# Altium PCB Ultrasound_Test_Prototype.PcbDoc
Units mil, origin at the board's own origin, x right, y up, seen from the top; angles counter-clockwise.
Board outline 1181.1 x 1181.1 mil, 2 copper layers (Top Layer, Bottom Layer); 34 components, 26 nets, 108 pads, 34 vias.
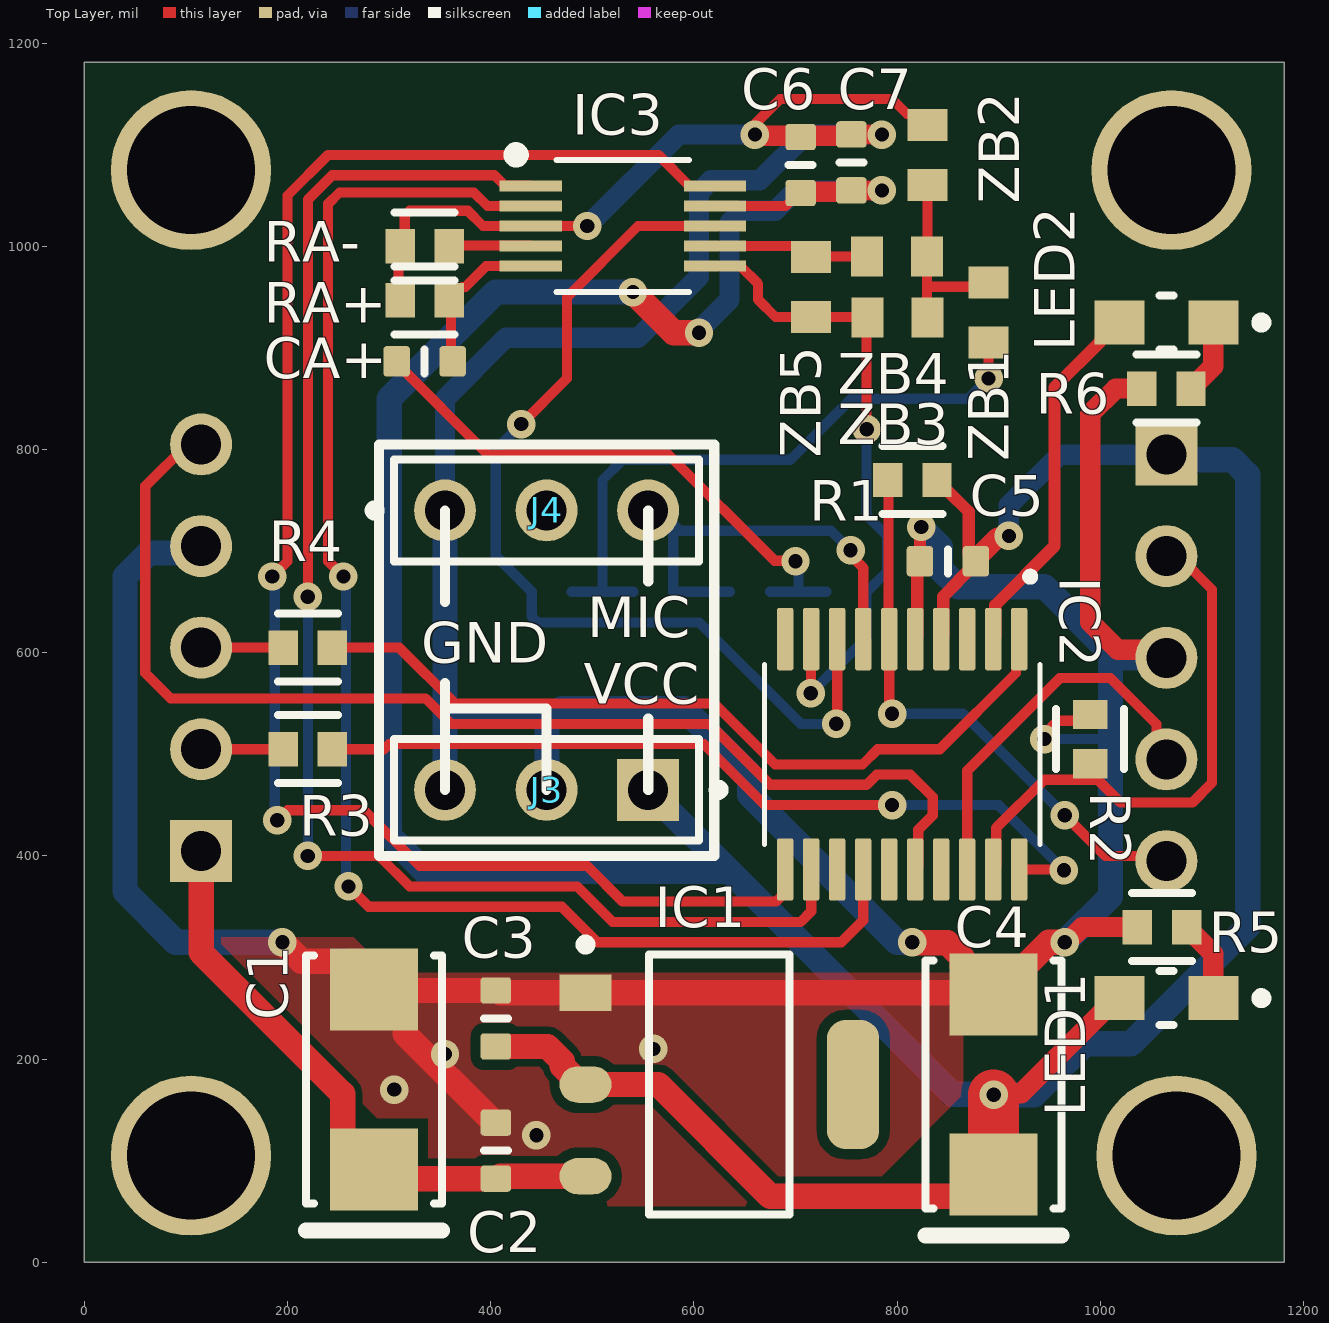
[diagram p0: Top Layer view]
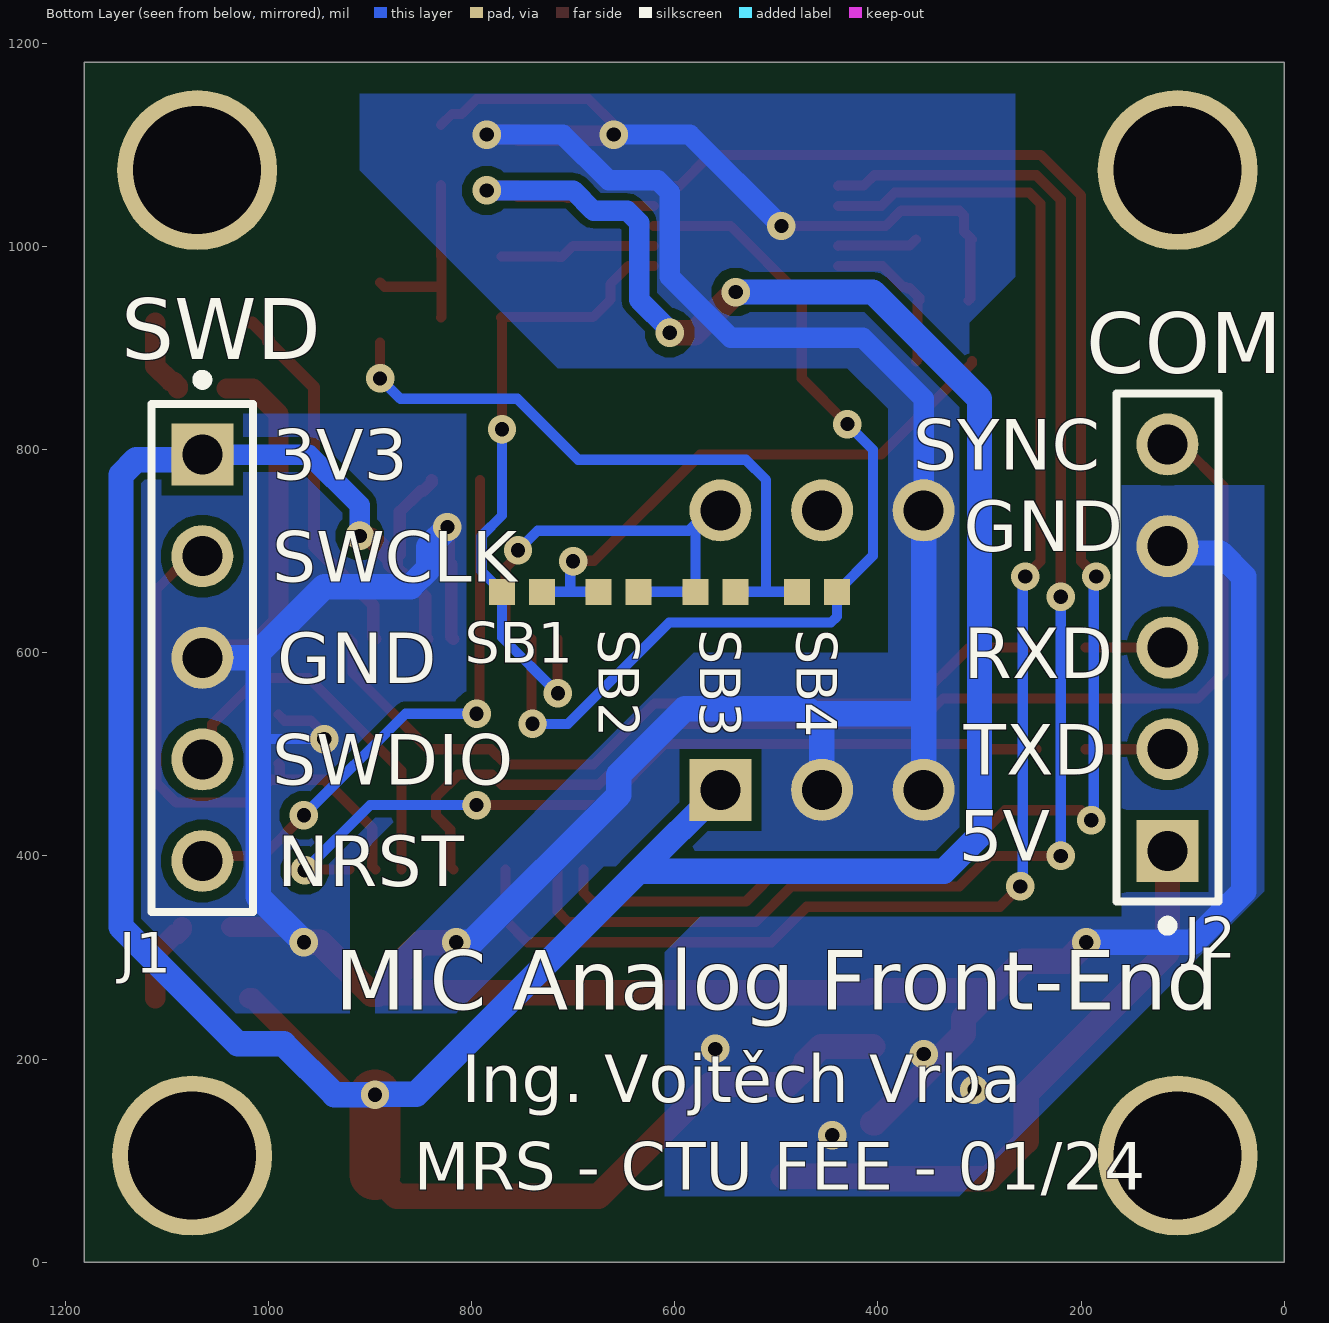
[diagram p1: Bottom Layer view, seen from below]
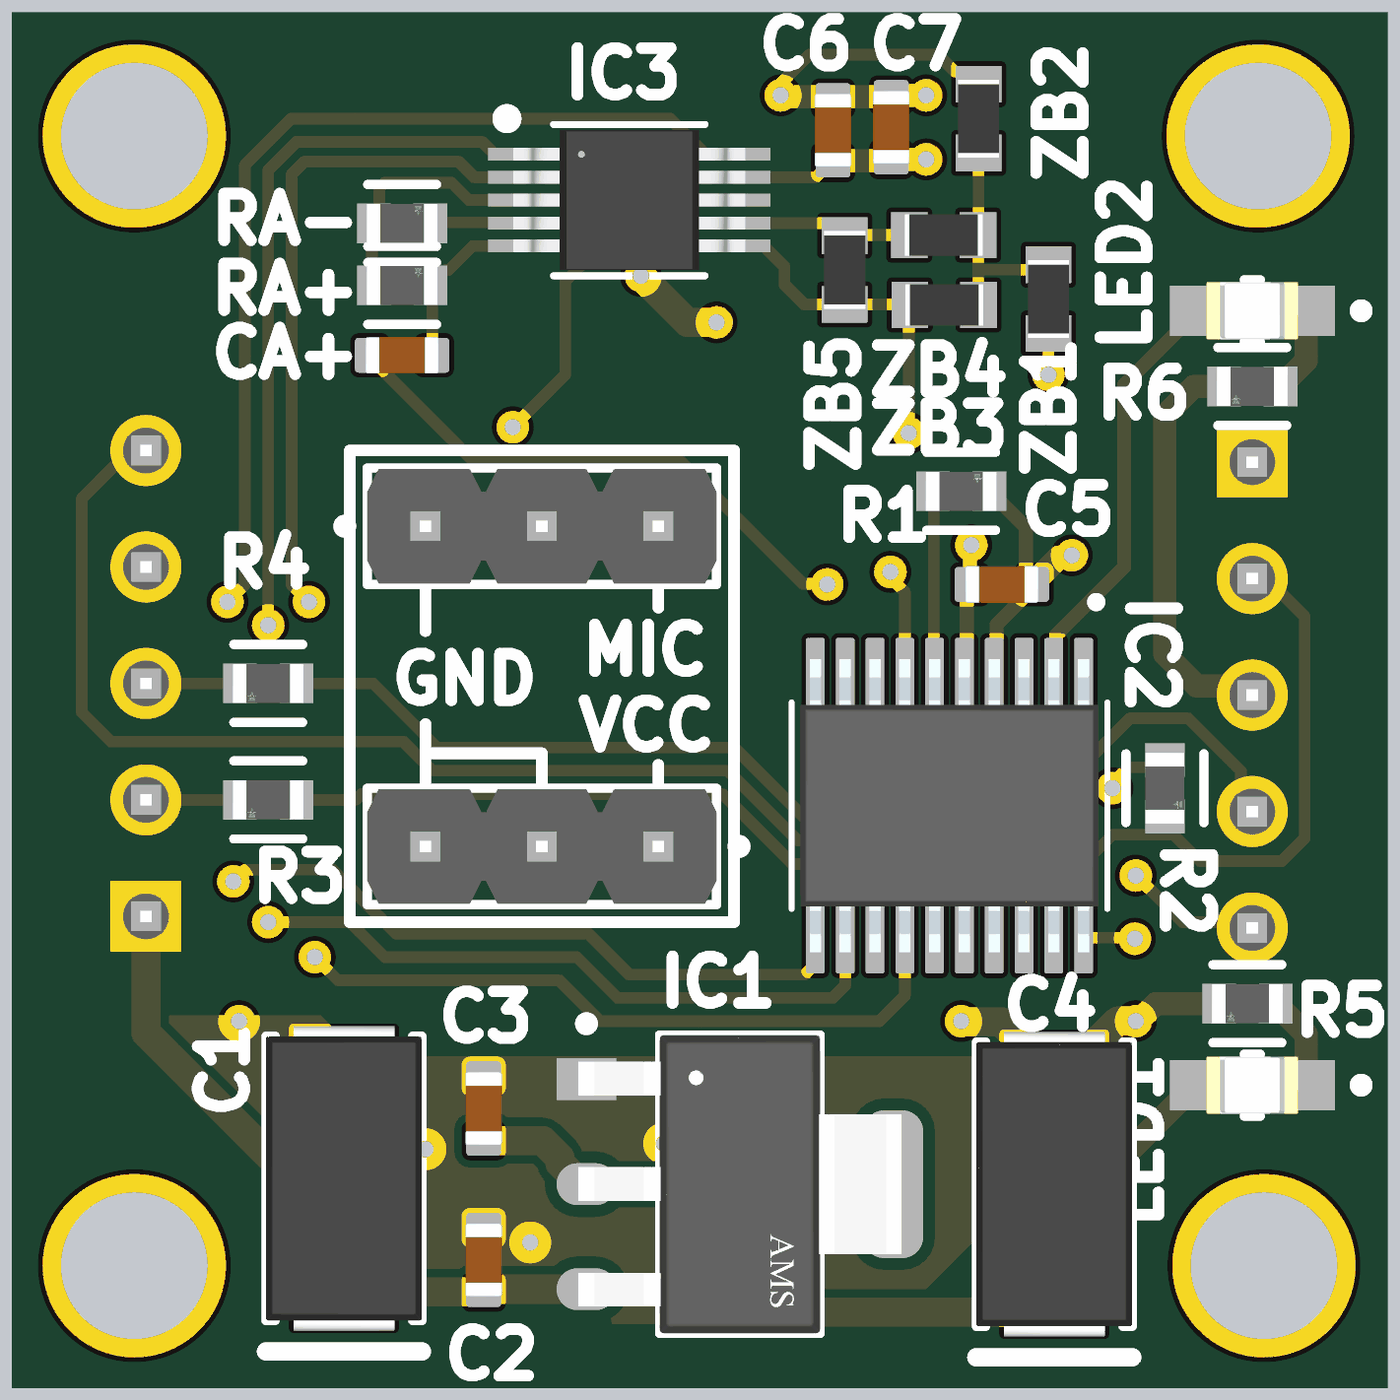
[diagram p2: 3D render of the assembled board from above, using the file's embedded part models]
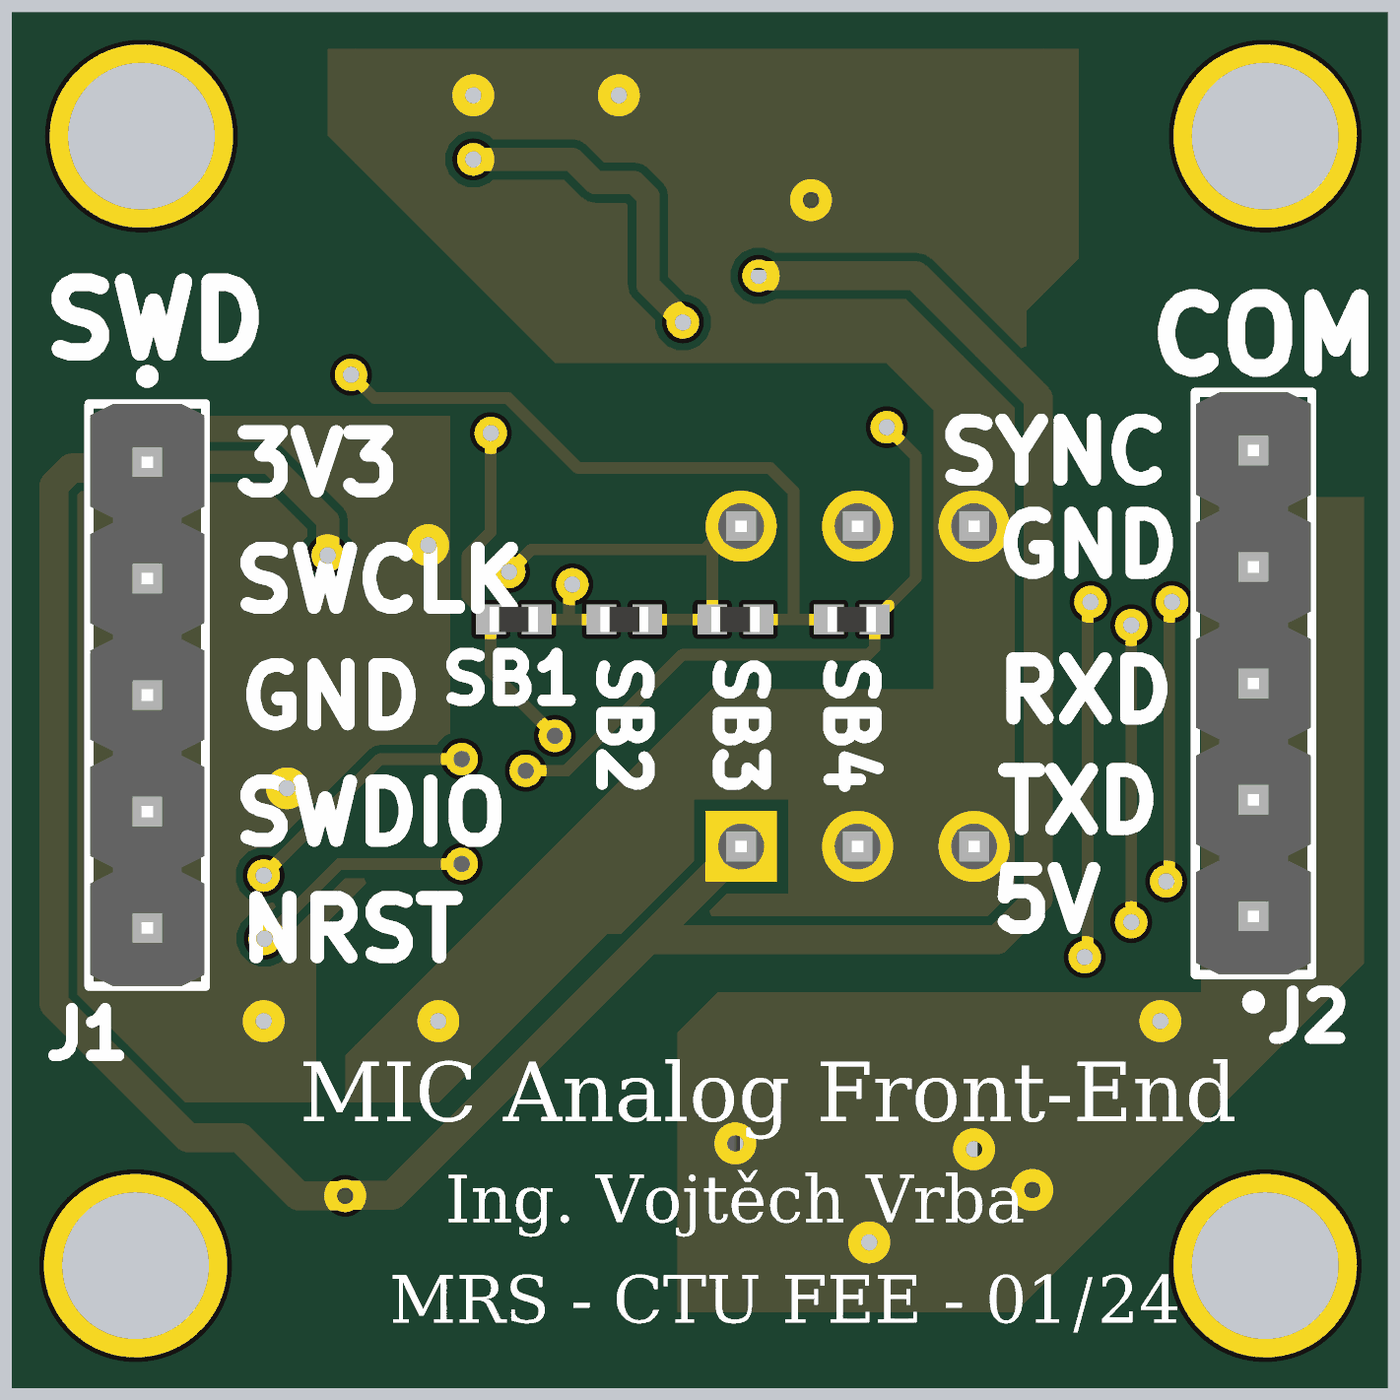
[diagram p3: 3D render of the assembled board from below, using the file's embedded part models]

## Layer stack, top to bottom
Top Solder: solder mask 0.4, Solder Resist, Dk 3.5
Top Layer: signal copper 1.4
Dielectric 1: dielectric 12.6, FR-4, Dk 4.8
Bottom Layer: signal copper 1.4
Bottom Solder: solder mask 0.4, Solder Resist, Dk 3.5

## Board outline
0,0 0,1181.1 1181.1,1181.1 1181.1,0

## Design rules (kind name [scope] priority, off if disabled: settings)
Clearance Clearance_1 [OnMid vs OnMid] p1: gap=7 ignorepadtopadclearanceinfootprint=FALSE except(10: SMDPad-Via SMDPad-Fill SMDPad-Poly SMDPad-Region SMDPad-Hole THPad-THPad THPad-Via THPad-Fill THPad-Poly THPad-Region THPad-Hole Via-Via Via-Fill Via-Poly Via-Region Via-Hole Fill-Fill Fill-Poly Fill-Region Fill-Hole Poly-Poly Poly-Region Poly-Hole Region-Region Region-Hole Hole-Hole) sourcerule=37 cellrowname=All cellrowtype=0 cellcolname=All cellcoltype=0 innerlayers=TRUE
Clearance Clearance_2 [(ExistsOnLayer('Top Layer') Or ExistsOnLayer('Bottom Layer')) vs (ExistsOnLayer('Top Layer') Or ExistsOnLayer('Bottom Layer'))] p2: gap=7 ignorepadtopadclearanceinfootprint=FALSE except(10: SMDPad-Via SMDPad-Fill SMDPad-Poly SMDPad-Region SMDPad-Hole THPad-THPad THPad-Via THPad-Fill THPad-Poly THPad-Region THPad-Hole Via-Via Via-Fill Via-Poly Via-Region Via-Hole Fill-Fill Fill-Poly Fill-Region Fill-Hole Poly-Poly Poly-Region Poly-Hole Region-Region Region-Hole Hole-Hole) sourcerule=37 cellrowname=All cellrowtype=0 cellcolname=All cellcoltype=0 outerlayers=TRUE
Clearance [All] p3: gap=10 ignorepadtopadclearanceinfootprint=FALSE ismatrix=TRUE
PlaneConnect [All] p1: planeconnectstyle=Direct reliefexpansion=20 reliefentries=4 reliefconductorwidth=10 reliefairgap=10
PolygonConnect [All] p1: connectstyle=Direct reliefconductorwidth=10 reliefentries=4 polygonreliefangle="90 Angle" airgapwidth=10
RoutingVias [All] p1: holewidth=28 width=50 viastyle="Through Hole" minholewidth=28 minwidth=50 maxholewidth=28 maxwidth=50
SolderMaskExpansion [All] p1: expansion=4 istentingtop=FALSE
Width MaxMinWidth_1 [All] p1: maxlimit=100 minlimit=10 preferedwidth=10 minimp=50.000000 maximp=50.000000 favimp=50.000000
Width [All] p2: maxlimit=10 minlimit=10 preferedwidth=10
29 further rules are at their usual default settings.

## Components (designator, comment, footprint, x,y, rotation, side; value= is the part's Value field where it differs from the comment)
C1 "TAJC107K010RNJ" AVX-TAJ-C-2_L 285,179.99 r90 top value=47u/10V
C2 "Capacitor 1µF +/-0.1% 25V 0603" CAPC0603(1608)100_L 405,109.99 r90 top value=100n
C3 "Capacitor 1µF +/-0.1% 25V 0603" CAPC0603(1608)100_L 405,239.99 r90 top value=100n
C4 "TAJC107K010RNJ" AVX-TAJ-C-2_L 895,174.99 r90 top value=47u/10V
C5 "Capacitor 1µF +/-0.1% 25V 0603" CAPC0603(1608)100_L 850,690 r180 top value=100n
C6 "Capacitor 1µF +/-0.1% 25V 0603" CAPC0603(1608)100_L 705,1080 r90 top value=100n
C7 "Capacitor 1µF +/-0.1% 25V 0603" CAPC0603(1608)100_L 755,1082.56 r90 top value=1u
CA+ "Capacitor 1µF +/-0.1% 25V 0603" CAPC0603(1608)100_L 335,886.81 r0 top value=10u
IC1 "AMS1117-3.3" FP-AMS1117-IPC_B 625,174.99 r0 top
IC2 "STM32G031F6P6TR" SOIC65P640X120-20N 805,500 r270 top
IC3 "MAX9939AUB+" 21-0061L_MXM-M 530,1020 r0 top
J1 "90120-0125" FP-90120-0125-MFG 1065,595 r270 bottom
J2 "90120-0125" FP-90120-0125-MFG 114.99,605 r90 bottom
J3 "90120-0123" FP-90120-0123-MFG#1 455,465 r180 top
J4 "90120-0123" FP-90120-0123-MFG#2 455,740 r0 top
LED1 "RED" FP-SML-21-MFG 1065,260 r180 top
LED2 "GREEN" FP-SML-21-MFG 1065,925 r180 top
R1 "Resistor European" FP-CRCW0603-e3-IPC_C 815,770 r0 top value=10k
R2 "Resistor European" FP-CRCW0603-e3-IPC_C 990,515 r270 top value=10k
R3 "Resistor European" FP-CRCW0603-e3-IPC_C 219.99,505 r180 top value=22R
R4 "Resistor European" FP-CRCW0603-e3-IPC_C 219.99,605 r180 top value=22R
R5 "Resistor European" FP-CRCW0603-e3-IPC_C 1060.77,330 r180 top value=330R
R6 "Resistor European" FP-CRCW0603-e3-IPC_C 1065,860 r180 top value=330R
RA+ "Resistor European" FP-CRCW0603-e3-IPC_C 335,946.81 r0 top value=200R
RA- "Resistor European" FP-CRCW0603-e3-IPC_C 335,1000 r0 top value=200R
SB1 "Resistor 0R +/- 5% 0402 100 mW" RESC1005X40X25ML05T05 750.31,660 r0 bottom value=Open
SB2 "Resistor 0R +/- 5% 0402 100 mW" RESC1005X40X25ML05T05 655.31,660 r0 bottom value=Close
SB3 "Resistor 0R +/- 5% 0402 100 mW" RESC1005X40X25ML05T05 560,660 r0 bottom value=Open
SB4 "Resistor 0R +/- 5% 0402 100 mW" RESC1005X40X25ML05T05 460,660 r0 bottom value=Close
ZB1 "Resistor 10k +/-1% 0603 100 mW" RESC1608X55X25ML10T15 890,935 r270 top value=TBD
ZB2 "Resistor 10k +/-1% 0603 100 mW" RESC1608X55X25ML10T15 830,1090 r270 top value=TBD
ZB3 "Resistor 10k +/-1% 0603 100 mW" RESC1608X55X25ML10T15 800.47,930 r0 top value=TBD
ZB4 "Resistor 10k +/-1% 0603 100 mW" RESC1608X55X25ML10T15 800,990 r0 top value=TBD
ZB5 "Resistor 10k +/-1% 0603 100 mW" RESC1608X55X25ML10T15 715,960 r90 top value=TBD

## Footprints (in the part's own frame and the unit in brackets; to place one, negate y for a bottom-side part, rotate by r counter-clockwise, add the part's x,y. Pads: shape width x height; smd on the part's side, far side on the other; paste and mask are expansions set on the pad)
21-0061L_MXM-M [mil]
  rect 61.15x11 smd paste+0 mask+0: 1(-90.58,39.37) 2(-90.58,19.68) 3(-90.58,0) 4(-90.58,-19.68) 5(-90.58,-39.37) 6(90.58,-39.37) 7(90.58,-19.68) 8(90.58,0) 9(90.58,19.68) 10(90.58,39.37)
  silkscreen extent -110,-65 65,75, body extent -99,-60 99,60, height 43
AVX-TAJ-C-2_L [mm] "Molded Capacitor, 2-Leads, Body 6.2x3.4mm, IPC High Density"
  rect 2.05x2.2 smd: 1(-2.25,0) 2(2.25,0)
  silkscreen extent -3.77,-1.7 3.1,1.7, body extent -3.32,-1.7 3.32,1.7, height 2.8
CAPC0603(1608)100_L [mm] "Chip Capacitor, Body 1.6x0.8mm, Height 1.0mm, IPC High Density"
  rrect25% 0.66x0.76 smd: 1(-0.7,0) 2(0.7,0)
  silkscreen extent 0,-0.3 0,0.3, body extent -0.8,-0.4 0.8,0.4, height 0.95
FP-90120-0123-MFG#1 [mm]
  rect 1.55x1.55 hole 1 paste-2539.97 mask+0: 1(-2.54,0)
  round 1.55 hole 1 paste-2539.97 mask+0: 2(0,0) 3(2.54,0)
  silkscreen extent -4.43,-1.27 3.81,1.27, body extent -3.91,-1.37 3.91,1.37, height 0.25
FP-90120-0123-MFG#2 [mm]
  round 1.55 hole 1 paste-2539.97 mask+0: 1(-2.54,0) 2(0,0) 3(2.54,0)
  silkscreen extent -4.42,-1.27 3.81,1.27, body extent -3.91,-1.37 3.91,1.37, height 0.25
FP-90120-0125-MFG [mm]
  rect 1.55x1.55 hole 1 paste-2539.97 mask+0: 1(-5.08,0)
  round 1.55 hole 1 paste-2539.97 mask+0: 2(-2.54,0) 3(0,0) 4(2.54,0) 5(5.08,0)
  silkscreen extent -7.07,-1.27 6.35,1.27, body extent -6.35,-1.25 6.35,1.25, height 9.65
FP-AMS1117-IPC_B [mm]
  rect 1.304x0.912 smd paste+0 mask+0: 1(-3.345,2.29)
  rrect100% 1.304x0.912 smd paste+0 mask+0: 2(-3.345,0) 3(-3.345,-2.29)
  rrect70% 1.304x3.222 smd paste+0 mask+0: 4(3.345,0)
  silkscreen extent -3.47,-3.25 1.75,3.62, body extent -4.25,-3.5 4.25,3.5, height 0.25
FP-CRCW0603-e3-IPC_C [mil]
  rect 28.94x33.94 smd paste+0 mask+0: 1(-24.23,0) 2(24.23,0)
  silkscreen extent -30,-33 30,33, body extent -43,-23 43,23, height 10
FP-SML-21-MFG [mm]
  rect 1.25x1.1 smd paste+0 mask+0: 1(-1.175,0) 2(1.175,0)
  silkscreen extent -2.5,-0.67 0.18,0.67, body extent -1.9,-0.77 1.9,0.77, height 0.25
RESC1005X40X25ML05T05 [mm] "Chip Resistor, 2-Leads, Body 1.05x0.55mm, IPC Low Density"
  rect 0.65x0.65 smd: 1(-0.5,0) 2(0.5,0)
  body extent -0.53,-0.28 0.53,0.28, height 0.4
RESC1608X55X25ML10T15 [mm] "Chip Resistor, 2-Leads, Body 1.70x0.90mm, IPC Low Density"
  rect 0.8x1 smd: 1(-0.75,0) 2(0.75,0)
  body extent -0.85,-0.45 0.85,0.45, height 0.55
SOIC65P640X120-20N [mm]
  rrect25% 1.56x0.41 smd: 1(-2.88,2.925) 2(-2.88,2.275) 3(-2.88,1.625) 4(-2.88,0.975) 5(-2.88,0.325) 6(-2.88,-0.325) 7(-2.88,-0.975) 8(-2.88,-1.625) 9(-2.88,-2.275) 10(-2.88,-2.925) 11(2.88,-2.925) 12(2.88,-2.275) 13(2.88,-1.625) 14(2.88,-0.975) 15(2.88,-0.325) 16(2.88,0.325) 17(2.88,0.975) 18(2.88,1.625) 19(2.88,2.275) 20(2.88,2.925)
  silkscreen extent -4.54,-3.44 2.25,3.44, body extent -3.2,-3.25 3.2,3.25, height 1.2

## Part data
C1 C4: library part CMP-001-00045-7, "Standard Tantalum, 100 uF, +/- 10%, 10 V, -55 to 125 degC, 2312 (6032 Metric), RoHS, Tape and Reel", Capacitor Type=Tantalum, Case/Package=2412, Manufacturer=AVX, Max Operating Temperature=125°C, Min Operating Temperature=-55°C, Package Description="2-Pin Surface Mount Device, Body 6 x 3.25 mm", Package Quantity=500, Package Reference=TAJ-C-2, Tolerance=10%, Voltage Rating=10V, Datasheet URL=http://datasheets.avx.com/TAJ.pdf, Datasheet Version=Feb-16, ESR=1.2Ohm, Manufacturer URL=http://www.avx.com/, Mounting Technology=SM, Packaging=TapeandReel, Pins=2, RoHS Compliant=True
C2 C3 C5 C6 C7 CA+: library part CMP-001-00055-4, "Chip Capacitor, 1µF +/-0.1%, 25V, 0603, Thickness 1 mm", Case/Package=0603, Max Operating Temperature=85°C, Min Operating Temperature=-55°C, Tolerance=20%, Voltage Rating=25V, Mounting Technology=SMT, Pins=2
IC1: library part CMP-019-00055-1, "Fixed Positive LDO Regulator, 3.3V, 1.3V Dropout, PDSO3", RoHS Compliant=Yes
IC2: library part CMP-020-00030-1, "Microcontroller 32-Bit ARM Cortex M0 32KByte Flash 1.7V to 3.6V 20-Pin TSSOP T/R", Case/Package=TSSOP-20, Clock Frequency=64MHz, Max Operating Temperature=85°C, Max Supply Voltage=3.6V, Min Operating Temperature=-40°C, Min Supply Voltage=1.7V, Nominal Supply Voltage=3.3V, I/Os=18, Mounting Technology=SMD, Pins=20, RAM Size=8kB
IC3: library part CMP-014-00005-2, "SPI-Programmable Gain Amplifier (PGA) with Input VOS Trim and Output Op Amp", Case/Package=UMAX-10, Input Offset Voltage-Max=15mV, Max Operating Temperature=125°C, Max Supply Current=6.7mA, Min Operating Temperature=-40°C, Nominal Supply Voltage=5V, Package Body Material=Plastic, Package Equivalence Code=TSSOP10,.19,20, Package Shape=Square, Package Style="SMALL OUTLINE, THIN PROFILE, SHRINK PITCHMeter", Power Supplies=3/5V, Supply Voltage Limit-Max=6V, Temperature Grade=AUTOMOTIVE, Amplifier Type="OPERATIONAL AMPLIFIER", Channels=1, Height - Seated (Max)=1.1mm, JESD-30 Code=S-PDSO-G10, JESD-609 Code=e3, Length=3mm, Moisture Sensitivity Level=1, Pins=10, Qualification Status="Not Qualified", Reach SVHC Compliant=Yes, RoHS Compliant=Yes, Slew Rate=6.4V/µs, Surface Mount=Yes, Technology=BICMOS, Terminal Finish=Tin, Terminal Form="Gull Wing", Terminal Pitch=0.5mm, Terminal Position=DUAL, Unity Gain BW-Nom=2.2MHz, Width=3mm
J1 J2: library part CMP-002-00091-1, "Board Connector, 5 Contact(s), 1 Row(s), Male, Straight, 0.1 inch Pitch, Solder Terminal, Black Insulator, Receptacle", Contact Resistance=20mR, Dielectric Withstanding Voltage (DC)=350V, Flammability Rating="UL94 V-0", Insulation Color=Black, Insulation Resistance=5GR, Max Operating Temperature=125°C, Min Operating Temperature=-55°C, Rated Current (Signal)=3A, Body Breadth=0.1inch, Body Depth=0.098inch, Body Length=0.5inch, Body/Shell Style=RECEPTACLE, Connector Type="BOARD CONNECTOR", Contact Finish - Mating="NOT SPECIFIED", Contact Finish - Termination="Gold (Au)", Contact Gender=Male, Contact Material="Copper Alloy", Contact Pattern=RECTANGULAR, Contact Style="SQ PIN-SKT", DIN Conformance=No, Filter Feature=No, IEC Conformance=No, Insertion Force-Max=3.0024N, Insulation Material=Glass, JESD-609 Code=e4, Mating Contact Pitch=0.1inch, Mating Information="MULTIPLE MATING PARTS AVAILABLE", MIL Conformance=No, Mixed Contacts=No, Mounting Style=STRAIGHT, Mounting Technology=Board, Number Of Connectors=1, Number of Contacts=5, Number Of PCB Rows=1, Number of Rows Loaded=1, Option="General Purpose", PCB Contact Pattern=RECTANGULAR, Plating Thickness=160uin, Reach SVHC Compliant=Yes, Reference Standard=UL, Reliability=COMMERCIAL, RoHS Compliant=Yes, Terminal Length=0.114inch, Terminal Pitch=2.54mm, Termination=Solder, Withdrawl Force-Min=0.1946N
J3 J4: library part CMP-002-00092-1, "Board Connector, 3 Contact(s), 1 Row(s), Male, Straight, 0.1 inch Pitch, Solder Terminal, Black Insulator, Receptacle", Contact Resistance=20mR, Dielectric Withstanding Voltage (DC)=350V, Flammability Rating="UL94 V-0", Insulation Color=Black, Insulation Resistance=5GR, Max Operating Temperature=125°C, Min Operating Temperature=-55°C, Rated Current (Signal)=3A, Body Breadth=0.1inch, Body Depth=0.098inch, Body Length=0.3inch, Body/Shell Style=RECEPTACLE, Connector Type="BOARD CONNECTOR", Contact Finish - Mating="NOT SPECIFIED", Contact Finish - Termination="Matte Tin (Sn) - with Nickel (Ni) barrier", Contact Gender=Male, Contact Material="Copper Alloy", Contact Pattern=RECTANGULAR, Contact Style="SQ PIN-SKT", DIN Conformance=No, Filter Feature=No, IEC Conformance=No, Insertion Force-Max=3.0024N, Insulation Material=Glass, JESD-609 Code=e3, Mating Contact Pitch=0.1inch, Mating Information="MULTIPLE MATING PARTS AVAILABLE", MIL Conformance=No, Mixed Contacts=No, Mounting Style=STRAIGHT, Mounting Technology=Board, Number Of Connectors=1, Number of Contacts=3, Number Of PCB Rows=1, Number of Rows Loaded=1, Option="General Purpose", PCB Contact Pattern=RECTANGULAR, Plating Thickness=160uin, Reach SVHC Compliant=Yes, Reference Standard=UL, Reliability=COMMERCIAL, RoHS Compliant=Yes, Terminal Length=0.114inch, Terminal Pitch=2.54mm, Termination=Solder, Withdrawl Force-Min=0.1946N
LED1 LED2: library part CMP-007-00036-1, "Single Color LED, Red, Colorless Transparent, 1.4mm", Case/Package=0805, Color=Red, Forward Current=25mA, Max Operating Temperature=85°C, Min Operating Temperature=-30°C, Reverse Voltage-Max=4V, Channels=1, Color@wavelength=Red, JESD-609 Code=e4, Lens Style=Colorless,TRANSPARENT, Luminous Intensity-Nom=4mcd, Mounting Technology="Surface Mount", Optoelectronic Device Type="SINGLE COLOR LED", Overall Height=0.8mm, Packaging=Bulk, Pins=2, Reach SVHC Compliant=Yes, RoHS Compliant=Yes, Shape=Rectangular, Size=1.4mm, Terminal Finish=Nickel, Terminal Pitch=1.35mm
R1 R2 R3 R4 R5 R6 RA+ RA-: library part CMP-009-00177-6, "Resistor European Symbol", Pins=2
SB1 SB2 SB3 SB4: library part CMP-009-00005-5, "Chip Resistor, 0 Ohm, 0.1 W, -55 to 155 degC, 0402 (1005 Metric)", Case/Package=0402, Max Operating Temperature=155°C, Min Operating Temperature=-55°C, Power=100mW, Tolerance=5%, Voltage Rating=50V, Mounting Technology=SM, Pins=2, RoHS Compliant=True
ZB1 ZB2 ZB3 ZB4 ZB5: library part CMP-009-00017-5, "Chip Resistor, 10 KOhm, +/- 1%, 01 W, -55 to 155 degC, 0603 (1608 Metric)", Case/Package=0603, Max Operating Temperature=155°C, Min Operating Temperature=-55°C, Power=100mW, Tolerance=1%, Voltage Rating=50V, Mounting Technology=SM, Pins=2, RoHS Compliant=True

## Free pads (board coordinates)
  round 157.48 hole 125.98: 3.2mm(105,105) 3.2mm(105,1075) 3.2mm(1070,1075) 3.2mm(1075,105)

## Via types
v1: diameter 28, hole 14, Top Layer to Bottom Layer, 34 vias

## Nets (pads, with @x,y where several pads share a name; then routed paths per layer and width w, separated by ;. In a path a pad name is that pad's centre, name@x,y a point inside that pad or via, vN(x,y) a via of type N, cw(c..) or ccw(c..) an arc to the next point about the centre after c; other vN are vias at no path point)
5V: C1.1 C2.1 IC1.3 J2.1 | length 598.8
  Top Layer w25: J2.1 114.99,305.01 254.19,165.81 254.19,119.27 291.02,82.43 C2.1 406.96,82.43 409.36,84.84 IC1.3
ADC_IN0_MIC: IC2.7 J4.3 SB2.1 SB3.2 | length 476.4
  Top Layer w10: v1(754.25,700.75) 754.25,695.88 766.61,683.51 IC2.7
  Bottom Layer w10: SB2.1 SB3.2 579.69,726.68 566.37,740 J4.3 555,726.19 561.19,720 570.21,729.02 577.35,729.02 586.37,720 735,720 v1(754.25,700.75)
ADC_IN1_A: IC2.8 IC3.8 SB4.1 | length 959.9
  Top Layer w10: v1(430,825) 475,870 475,950 545,1020 IC3.8 ; v1(740,530) 741,531 IC2.8
  Bottom Layer w10: v1(430,825) 405,800 405,695.32 SB4.1 440.31,635.54 446.17,629.68 605.32,629.68 705,530 v1(740,530)
ADC_IN2_B: IC2.9 IC3.6 SB1.2 ZB3.1 ZB5.1 | length 643.7
  Top Layer w10: IC3.6 645.65,980.63 663.23,963.05 663.23,947.55 680.31,930.47 ZB5.1 770.47,930.47 ZB3.1 770,929.06 v1(770,820) ; v1(715,560) 715.22,560.22 715.22,613.17 IC2.9
  Bottom Layer w10: v1(715,560) 770,615 SB1.2 790,680 790,715 770,735 v1(770,820)
GND: C1.2 C2.2 C3.2 C4.2 C5.2 C6.2 C7.2 IC1.1 IC2.5 IC3.3 J1.3 J2.4 J3.2 J3.3 J4.1 R2.1 R5.2 R6.2 RA+.1 RA-.1 ZB2.1 | length 5377.4
  Top Layer w10: RA+.1 309.11,948.48 309.11,1005.15 307.44,1006.81 315.44,1014.81 315.44,1030.44 320,1035 377.4,1035 392.4,1020 IC3.3 v1(495,1020) ; v1(660,1110) 660,1120 685,1145 795,1145 809.72,1130.28 819.25,1130.28 ZB2.1 ; v1(945,515) 945,519.87 958.03,532.9 958.03,533.03 983.8,533.03 R2.1
  Top Layer w12: IC2.5 819.87,615.46 819.87,687.43 C5.2 822.44,722.44 v1(823.72,723.72) v1@825,725
  Top Layer w20: v1(660,1110) 661.22,1108.78 703.78,1108.78 C6.2 706.28,1108.84 753.72,1108.84 C7.2 755.12,1110 v1(785,1110) ; v1(965,315) 967.16,315 982.16,330 R5.2 ; R6.2 1015,860 990,835 990,630 1017.15,602.85 1057.15,602.85 J1.3
  Top Layer w25: v1(195,315) 213.57,296.43 257.15,296.43 C1.2 287.95,268.58 C1.2@288.98,267.55 ; C2.2 403.04,137.55 315.81,224.78 315.81,240.72 C1.2@288.98,267.55 ; v1(815,315) 815.57,314.43 849.55,314.43 864.19,299.78 864.19,291.43 C4.2@890.47,265.15 ; v1(965,315) 949.38,315 897.95,263.58 C4.2 ; C1.2@288.98,267.55 C3.2 406.96,267.55 409.36,265.15 IC1.1 C4.2@890.47,265.15 ; C4.2@890.47,265.15 892.05,263.58 C4.2 ; C4.2@890.47,265.15 893.43,265.15 C4.2
  Bottom Layer w10: v1(945,515) 1010,515
  Bottom Layer w20: J4.1 355,850 415,910 545,910 605,970 605,1053.28 616.72,1065 665,1065 710,1110 v1(785,1110) ; v1(495,1020) 585,1110 v1(660,1110)
  Bottom Layer w25: J2.4 108.1,698.11 63.11,698.11 40,675 40,365 90,315 v1(195,315) ; J3.3 355,540 ; J4.1 355,540 ; J3.2 455.36,465.36 455.36,530.36 465,540 ; v1(815,315) 800,315 655,460 655,480 590,545 470,545 465,540 ; v1(823.72,723.72) 823.72,722.91 842.32,704.31 842.32,682.68 860,665 945,665 1010,600 1010,595 ; v1(965,315) 1010,360 1010,515 1010,595 ; J1.3 1010,595 ; 355,540 465,540
  other v1: 445,125 305,170 355,205 560,210
HP_IN: CA+.1 SB1.1 SB2.2 | length 562
  Top Layer w10: CA+.1 307.44,884.85 397.29,795 575,795 679.49,690.51 699.49,690.51 v1(700,690)
  Bottom Layer w10: SB2.2 702.82,660 ; v1(700,690) 702.82,687.18 702.82,660 ; SB1.1 702.82,660
INA+: CA+.2 IC3.5 RA+.2 | length 157
  Top Layer w10: CA+.2 360.89,888.48 360.89,945.15 RA+.2 359.23,949.31 368.7,958.78 371.2,958.78 372.42,960 375,960 395.63,980.63 IC3.5
INA-: IC3.4 RA-.2 | length 79.6
  Top Layer w10: RA-.2@362.56,1006.81 368.56,1000.82 438.92,1000.82 IC3.4
INB: IC3.7 ZB4.1 ZB5.2 | length 154.6
  Top Layer w10: IC3.7 700.28,1000.32 711.06,989.53 ZB5.2 715.47,990 ZB4.1
LED2: IC2.2 LED2.2 | length 364.8
  Top Layer w12: IC2.2 896.64,615.46 896.64,646.64 955,705 955,861.26 1000.13,906.39 1000.13,909.35 1015.79,925 LED2.2
MFB: ZB1.1 ZB2.2 ZB3.2 ZB4.2 | length 193.1
  Top Layer w10: ZB3.2 829.53,930.47 829.53,960.24 ; ZB2.2 830,990.47 ZB4.2 829.53,964.53 829.53,960.24 ; ZB1.1 885.71,960.24 829.53,960.24
MFB_IN: SB3.1 SB4.2 ZB1.2 | length 627.5
  Top Layer w10: v1(890,870) ZB1.2
  Bottom Layer w10: SB4.2 510,660 ; SB3.1 510,660 ; v1(890,870) 870,850 755,850 695,790 530,790 510,770 510,660
NRST: IC2.6 J1.5 R1.1 | length 561.5
  Top Layer w10: R1.1@791.49,770 791.49,614.1 IC2.6 792.2,542.8 v1(795,540) ; v1(965,440) 1005,400 1060,400 J1.5
  Bottom Layer w10: v1(795,540) 865,540 v1(965,440)
PB6: IC2.20 R3.1 | length 819
  Top Layer w10: R3.1 295,505 300,510 610,510 670,450 v1(795,450) ; IC2.20 963.39,386.61 v1(964.19,385.81) v1@965,385
  Bottom Layer w10: v1(795,450) 900,450 v1(964.19,385.81)
PB7: IC2.1 R4.1 | length 792.4
  Top Layer w10: R4.1 310,605 365,550 620,550 680,490 765.96,490 780.96,505 842.04,505 917.09,580.04 917.09,610.31 IC2.1
R5: LED1.1 R5.1 | length 82.3
  Top Layer w20: R5.1 1085,327.5 1089.47,323.03 1091.97,323.03 1111.26,303.74 LED1.1
R6: LED2.1 R6.1 | length 75.6
  Top Layer w20: R6.1 1089.23,862.5 1093.7,866.97 1096.2,866.97 1111.26,882.03 LED2.1
SPI1_MOSI: IC2.14 IC3.2 | length 1478.1
  Top Layer w10: v1(255,675) 240,690 240,1041.92 251.08,1053 383.44,1053 396.75,1039.68 IC3.2 ; v1(260,370) 280,350 470,350 505,315 745,315 766.61,336.61 IC2.14
  Bottom Layer w10: v1(255,675) 257.5,672.5 257.5,372.5 v1(260,370)
SPI1_NSS: IC2.11 IC3.10 | length 1640.7
  Top Layer w10: v1(185,675) 200,690 200,1050 240,1090 564.87,1090 595.5,1059.37 IC3.10 ; v1(190,435) 200,445 275,445 330,390 495,390 530,355 680.87,355 689.84,363.98 IC2.11
  Bottom Layer w10: v1(185,675) 187.5,672.5 187.5,437.5 v1(190,435)
SPI1_SCK: IC2.12 IC3.1 | length 1447.6
  Top Layer w10: v1(220,400) 290,400 320,370 485,370 520,335 705,335 715.43,345.43 IC2.12 ; v1(220,655) 220,1045.96 244.04,1070 403.72,1070 413.85,1059.87 438.92,1059.87 IC3.1
  Bottom Layer w10: v1(220,400) v1(220,655)
SWCLK: IC2.19 J1.2 R2.2 | length 556.9
  Top Layer w10: IC2.19 897.64,389.69 897.64,427.64 945,475 988.78,475 ; R2.2 988.78,489.55 988.78,475 ; J1.2 1077.26,695 1110,662.26 1110,471.86 1090.63,452.49 1020.07,452.49 997.56,475 988.78,475
SWDIO: IC2.18 J1.4 | length 378.9
  Top Layer w10: IC2.18 868.98,483.98 960,575 1010,575 1055.32,529.68 1055.32,504.68 J1.4
SYNC: IC2.16 J2.5 | length 1168.2
  Top Layer w10: J2.5 101.19,805 60,763.81 60,580 85,555 335.96,555 360.96,530 615,530 675,470 770,470 780,480 813,480 835,458 835,440 820.87,425.87 820.87,389.69 IC2.16
USART1_RX: J2.3 R4.2 | length 80.8
  Top Layer w10: J2.3 R4.2
USART1_TX: J2.2 R3.2 | length 80.8
  Top Layer w10: J2.2 R3.2
VCC: C3.1 C4.1 C5.1 C6.1 C7.1 IC1.2 IC2.4 IC3.9 J1.1 J3.1 LED1.2 R1.2 | length 4147.3
  Top Layer w10: IC3.9 690.28,1039.68 703.04,1052.44 C6.1
  Top Layer w12: R1.2 839.23,767.5 847.7,759.03 850.2,759.03 870.56,738.67 C5.1@870.56,697 ; IC2.4 845.46,615.46 845.46,655.46 860,670 860,670.48 C5.1@877.56,688.04
  Top Layer w20: C6.1 706.28,1053.72 753.72,1053.72 C7.1 v1(785,1055) ; C5.1@877.56,688.04 C5.1 877.56,691.96 899.07,713.47 908.47,713.47 v1(910,715) ; v1(895,165) 896.53,166.53 922.32,166.53 1015.79,260 LED1.2
  Top Layer w25: C3.1 455.87,212.43 470.51,197.79 470.51,193.02 488.54,174.99 IC1.2 565.01,174.99 675,65 873.59,65 C4.1 ; v1(540,955) 580,915 v1(605,915)
  Top Layer w50: C4.1 v1(895,165)
  Bottom Layer w20: v1(605,915) 605,917.16 635,947.16 635,1023.28 646.72,1035 680,1035 700,1055 v1(785,1055) ; v1(910,715) 910,745 960,795 J1.1
  Bottom Layer w25: v1(540,955) 405,955 300,850 300,420 335,385 635,385 ; J3.1 635,385 ; J1.1 1070,790 1130,790 1145,775 1145,330 1030,215 985,215 935,165 v1(895,165) 894.43,165.57 854.43,165.57 635,385
pads on no net: IC1.4 IC2.3 IC2.10 IC2.13 IC2.15 IC2.17 J4.2

## Polygon pours and split planes (outlines as drawn)
GND on Bottom Layer "NONET_L-01_P-001" (solid, remove dead copper, pour order 2): 20,765 160,765 160,340 575,340 610,305 610,65 320,65 20,365
GND on Bottom Layer "NONET_L-01_P-001" (solid, remove dead copper, pour order 1): 805,835 805,505 920,390 920,245 1150,245 1155,240 1160,245 1160,835
GND on Bottom Layer "NONET_L-01_P-001" (solid, remove dead copper, pour order 0): 895,245 895,286.1 581.1,600 390,600 390,840 430,880 715,880 910,1075 910,1150 265,1150 265,970 310,925 310,390 670,390 815,245
GND on Top Layer "NONET_L-01_P-001" (solid, remove dead copper, pour order 3): 110,320 265,320 300,285 865,285 865,165 755,55 375,55

## Silkscreen, mask and mechanical layers (free items; w line width, h text height)
Top Overlay:
  lines w10: 355,465 355,570 ; 355,545 455,545 455,465 ; 355,650 355,740 ; 555,465 555,535 ; 555,670 555,740 ; 290,400 620,400 620,805 290,805 290,400
  text "MIC" at 495.02,615.01 h40
  text "GND" at 331.68,590.01 h40
  text "VCC" at 491.68,550.01 h40
Bottom Overlay:
  text "SWD" at 1144.98,888.63 h60
  text "COM" at 194.97,875.01 h60
  text "SYNC" at 365.27,780.01 h50
  text "3V3" at 996.27,770.01 h50
  text "GND" at 315.29,700.01 h50
  text "SWCLK" at 996.27,670.01 h50
  text "RXD" at 315.29,575.01 h50
  text "GND" at 991.27,570.01 h50
  text "TXD" at 315.29,480.01 h50
  text "SWDIO" at 996.27,470.01 h50
  text "5V" at 320.31,395.01 h50
  text "NRST" at 991.27,370.01 h50
  text "MIC Analog Front-End" at 934.29,229.16 h100
  text "Ing. Vojtěch Vrba" at 809.39,142.33 h80
  text "MRS - CTU FEE - 01/24" at 857.06,56.11 h80

## Text inside footprints (layer, text, board x,y; h text height)
IC3: Mechanical 13 "*" at 472.5,1027 h50